# EAGLE board untitled (EAGLE 9.6.2)

No outline drawn. Coordinates in mm, seen from the top.
Copper layers (1*16): Top 0.035mm / dielectric 1.6mm / Bottom 0.035mm
Design rules "Elecrow_2-layer_PCB_eagle_rule": minimum track width 6mil, minimum drill 12mil, track to track 6mil, track to pad 6mil, pad to pad 6mil, via to via 8mil, smd to smd 0mil, copper to edge 20mil, drill to drill 10mil, minimum pad ring 6mil, minimum via ring 6mil, stop-mask expansion 0mil, vias tented up to drill 100mil, thermal gap 10mil

## Footprints (pad centres in the part's own frame; a part is rotated, then mirrored left to right if it is on the bottom)
0603 = smd 1.1 x 1: 1 -0.85,0; 2 0.85,0
1X10 = drill 1.016 pad 1.88: 1 0,0; 2 2.54,0; 3 5.08,0; 4 7.62,0; 5 10.16,0; 6 12.7,0; 7 15.24,0; 8 17.78,0; 9 20.32,0; 10 22.86,0
AXIAL-0.3 = drill 0.9 pad 1.88: P$1 -3.81,0; P$2 3.81,0
DIP787W45P254L1016H533Q8 = drill 0.83 square: 1 -3.937,3.81 | drill 0.83: 2 -3.937,1.27; 3 -3.937,-1.27; 4 -3.937,-3.81; 5 3.937,-3.81; 6 3.937,-1.27; 7 3.937,1.27; 8 3.937,3.81
XCVR_ESP32-WROOM-32E_(16MB) = smd 1.5 x 0.9: 1 -8.75,5.26; 2 -8.75,3.99; 3 -8.75,2.72; 4 -8.75,1.45; 5 -8.75,0.18; 6 -8.75,-1.09; 7 -8.75,-2.36; 8 -8.75,-3.63; 9 -8.75,-4.9; 10 -8.75,-6.17; 11 -8.75,-7.44; 12 -8.75,-8.71; 13 -8.75,-9.98; 14 -8.75,-11.25; 25 8.75,-11.25; 26 8.75,-9.98; 27 8.75,-8.71; 28 8.75,-7.44; 29 8.75,-6.17; 30 8.75,-4.9; 31 8.75,-3.63; 32 8.75,-2.36; 33 8.75,-1.09; 34 8.75,0.18; 35 8.75,1.45; 36 8.75,2.72; 37 8.75,3.99; 38 8.75,5.26 | smd 0.9 x 1.5: 15 -5.715,-12.5; 16 -4.445,-12.5; 17 -3.175,-12.5; 18 -1.905,-12.5; 19 -0.635,-12.5; 20 0.635,-12.5; 21 1.905,-12.5; 22 3.175,-12.5; 23 4.445,-12.5; 24 5.715,-12.5 | smd 0.9 x 0.9: 39_1 -2.9,-1.06; 39_2 -1.5,-1.06; 39_3 -0.1,-1.06; 39_4 -2.9,-2.46; 39_5 -1.5,-2.46; 39_6 -0.1,-2.46; 39_7 -2.9,-3.86; 39_8 -1.5,-3.86; 39_9 -0.1,-3.86 | drill 0.2 pad 0.3: 39_10 -2.2,-1.06; 39_11 -0.8,-1.06; 39_12 -2.9,-1.76; 39_13 -1.5,-1.76; 39_14 -0.1,-1.76; 39_15 -2.2,-2.46; 39_16 -0.8,-2.46; 39_17 -2.9,-3.16; 39_18 -1.5,-3.16; 39_19 -0.1,-3.16; 39_20 -2.2,-3.86; 39_21 -0.8,-3.86
DPAK228P968X238-4N = smd 0.96 x 1.9: 1 -2.28,-4.59; 3 2.28,-4.59 | smd 5.63 x 6.84: 2 0,2.12
SOT363 = smd 0.3 x 0.99: 1 -0.65,-0.8; 2 0,-0.8; 3 0.65,-0.8; 4 0.65,0.81; 5 0,0.81; 6 -0.65,0.81
BAT = drill 2 octagon: + 2.54,0 | drill 2 square: G -2.54,0
JST-XH-03-PACKAGE-LONG-PAD = drill 1.016 long: 1 -2.54,0; 2 0,0; 3 2.54,0
JST-XH-04-PACKAGE-LONG-PAD = drill 1.016 long: 1 -3.81,0; 2 -1.27,0; 3 1.27,0; 4 3.81,0

## Placement (x,y rotation side)
C1  4.7uF  [0603]  -20.95,-30.48 0 top
C2  4.7uF  [0603]  -28.42,-37.15 0 top
C3  4.7uF  [0603]  -28.42,-40.48 0 top
C4  0.1uF  [0603]  -28.26,-43.81 0 top
C5  0.1uF  [0603]  -28.26,-47.15 0 top
J1  [1X10]  12.86,1.75 0 top
J2  [1X10]  35.72,9.37 180 top
R1  120Ω  [AXIAL-0.3]  56.36,0 90 top
R2  10K  [0603]  -21.11,-33.81 0 top
R4  100K  [0603]  -21.11,-23.81 0 top
R5  100K  [0603]  -21.11,-27.15 0 top
U1  MCP2562-E/P  [DIP787W45P254L1016H533Q8]  50.01,0 0 top
U2  ESP32-WROOM-32E_(16MB)  [XCVR_ESP32-WROOM-32E_(16MB)]  2.54,-17.3 90 top
U3  NJM2845DL1-33-TE1  [DPAK228P968X238-4N]  -26.51,-27.94 0 top
U$1  2N7002DW  [SOT363]  -20.8,-14.13 0 top
U$2  BAT  [BAT]  6.19,0 270 top
X1  JST-XH-03-PIN-LONG-PAD  [JST-XH-03-PACKAGE-LONG-PAD]  28.73,-5.71 90 bottom
X2  JST-XH-04-PIN-LONG-PAD  [JST-XH-04-PACKAGE-LONG-PAD]  0,0 270 top
X3  JST-XH-04-PIN-LONG-PAD  [JST-XH-04-PACKAGE-LONG-PAD]  62.39,0 90 top
X4  JST-XH-03-PIN-LONG-PAD  [JST-XH-03-PACKAGE-LONG-PAD]  23.34,-5.71 270 bottom

## Library data of the parts
C1-C3 = SparkFun-Capacitors; PROD_ID: CAP-08280
C4 C5 = SparkFun-Capacitors; PROD_ID: CAP-00810
J1 J2 = SparkFun-Connectors; PROD_ID: CONN-11563
R1 = SparkFun-Resistors
R2 R4 R5 = SparkFun-Resistors; PROD_ID: RES-07857
U1 = MCP2562-E_P; AVAILABILITY: In Stock; DESCRIPTION: 1/1 Transceiver Half CANbus 8-PDIP; MF: Microchip; MP: MCP2562-E/P; PACKAGE: DIP-8 Microchip; PRICE: None; PURCHASE-URL: https://pricing.snapeda.com/search/part/MCP2562-E/P/?ref=eda
U2 = ESP32-WROOM-32E__16MB_; AVAILABILITY: In Stock; DESCRIPTION: Bluetooth, WiFi 802.11b/g/n, Bluetooth v4.2 +EDR, Class 1, 2 and 3 Transceiver Module 2.4GHz ~ 2.5GHz Integrated, Trace Surface Mount; MF: Espressif Systems; MP: ESP32-WROOM-32E (16MB); PACKAGE: None; PRICE: None
U3 = NJM2845DL1-33-TE1; AVAILABILITY: In Stock; DESCRIPTION: Linear Voltage Regulator IC Positive Fixed 1 Output 800mA TO-252-3; MF: NJR Corporation/NJRC; MP: NJM2845DL1-33-TE1; PACKAGE: TO-252-3 New Japan Radio; PRICE: None; PURCHASE-URL: https://pricing.snapeda.com/search/part/NJM2845DL1-33-TE1/?ref=eda
U$1 = 2N7002DW; AVAILABILITY: In Stock; DESCRIPTION: Mosfet Array 2 N-Channel (Dual) 60V 115mA 200mW Surface Mount SC-88 (SC-70-6); MF: ON Semiconductor; MP: 2N7002DW; PACKAGE: SC-88-6 ON Semiconductor; PRICE: None; PURCHASE-URL: https://pricing.snapeda.com/search/part/2N7002DW/?ref=eda
U$2 = BAT
X1-X4 = JST XH Connectors

## Nets
1WIRE: U2.9 X1.1
3V3: C2.1 C5.2 J2.1 R2.2 U2.2 U3.3 X1.2 X4.2
AIN: U2.8 X4.1
CAN_RX: J2.2
CAN_RX_5V: J1.9 U1.4
CAN_TX: J2.3
CAN_TX_5V: J1.8 U1.1
CANH: R1.P$2 U1.7 X2.3 X3.3
CANL: R1.P$1 U1.6 X2.2 X3.2
DTR: R4.2 U$1.2 U$1.4
EN: C1.1 U2.3 U$1.6
GND: C1.2 C2.2 C3.1 C4.2 C5.1 J1.1 J2.10 U1.2 U1.8 U2.1 U2.15 U2.38 U2.39_1 U2.39_2 U2.39_3 U2.39_4 U2.39_5 U2.39_6 U2.39_7 U2.39_8 U2.39_9 U3.2 U$2.G X1.3 X2.1 X3.1 X4.3
IO0: R2.1 U2.25 U$1.3
LED: U2.24
N$3: R4.1 R5.1
N$7: U1.5
RTS: R5.2 U$1.1 U$1.5
RXD0: U2.34
SCL: U2.36
SDA: U2.33
TXD0: U2.35
VDD_5V: J1.10 U1.3 U$2.+ X2.4 X3.4
VIN: C3.2 C4.1 U3.1

## Tracks (layer width: path | path; a pad name or v marks a point on that pad's centre or on a via)
1WIRE  (1 unrouted)
3V3  (7 unrouted)
AIN  (1 unrouted)
CAN_RX_5V  (1 unrouted)
CAN_TX_5V  (1 unrouted)
CANH  (3 unrouted)
CANL  (3 unrouted)
DTR  (2 unrouted)
EN  (2 unrouted)
GND  (26 unrouted)
IO0  (2 unrouted)
N$3  (1 unrouted)
RTS  (2 unrouted)
VDD_5V  (4 unrouted)
VIN  (2 unrouted)